# EAGLE board Module_T+H_01v (EAGLE 7.7.0)
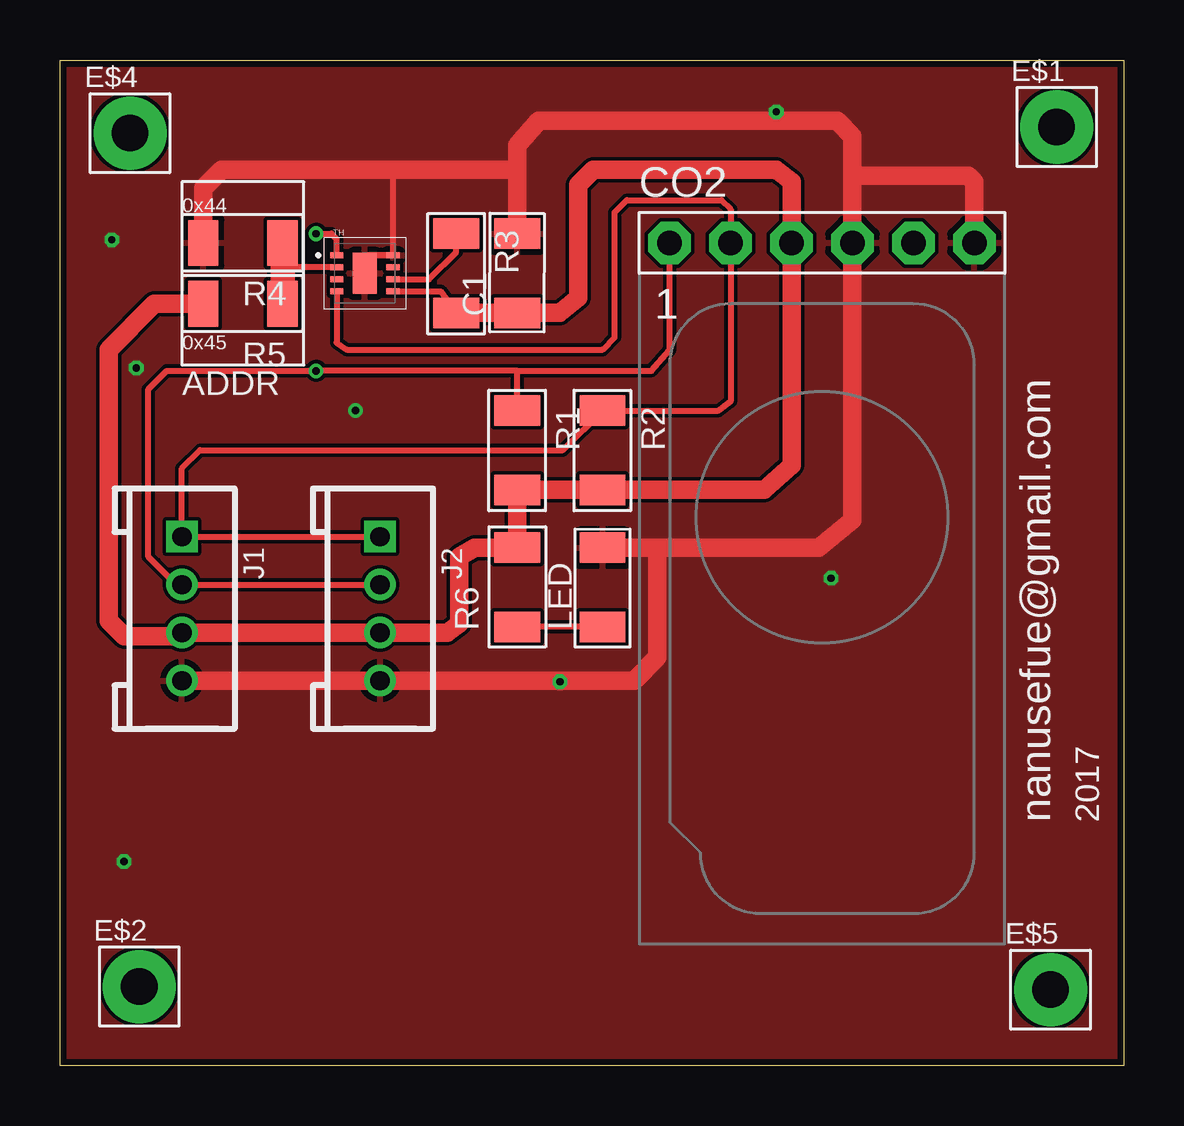
[diagram p0: board, top side]
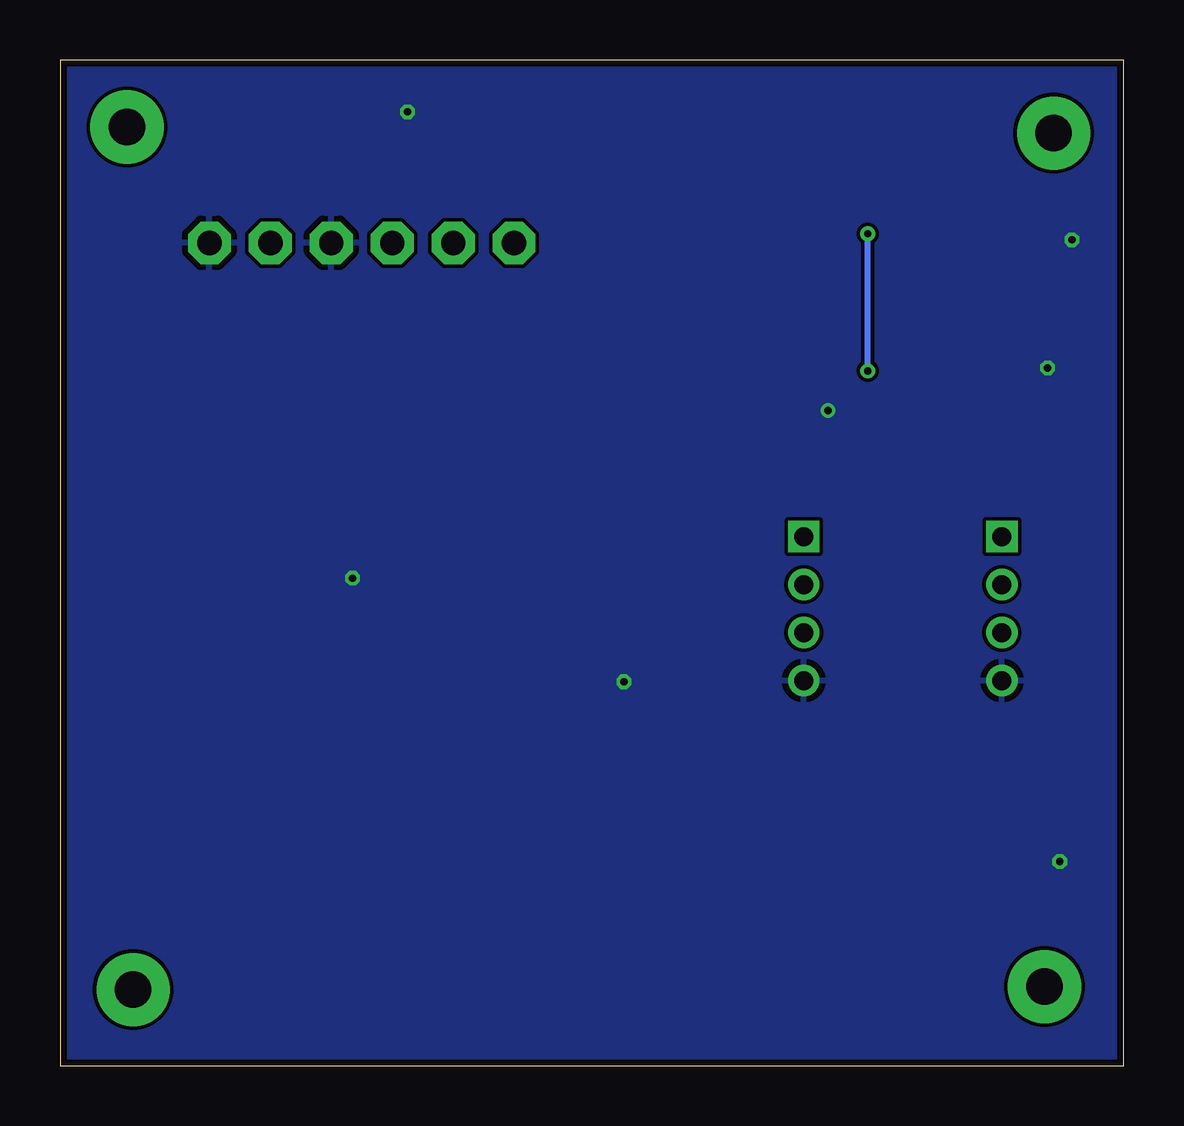
[diagram p1: board, bottom side, seen from below]

Size 44.32 x 41.91 mm. Coordinates in mm from the lower left corner, seen from the top.
Outline: 0,0 0,41.91 44.32,41.91 44.32,0 0,0
Copper layers (1*16): Top 0.035mm / dielectric 1.5mm / Bottom 0.035mm
Design rules "SeeedStudio_2layer_DRU_no_angle_20140221": minimum track width 6mil, minimum drill 12mil, track to track 6mil, track to pad 6mil, pad to pad 6mil, via to via 6mil, smd to smd 0mil, copper to edge 10mil, drill to drill 10mil, minimum pad ring 10mil, minimum via ring 6mil, stop-mask expansion 2mil, vias tented up to drill 100mil, thermal gap 10mil

## Footprints (pad centres in the part's own frame; a part is rotated, then mirrored left to right if it is on the bottom)
C1206FAB = smd 1.27 x 1.905: 1 -1.651,0; 2 1.651,0
PINS = drill 1.016 pad 1.778 octagon: GND 1.27,0; NC/GND/10K 6.35,0; PWM/FC 3.81,0; RX/SCL -3.81,0; TX/SDA -6.35,0; VCC -1.27,0
1P-100/60MIL = drill 1.524 pad 3.048: 1 0,0
HW4-2.0 = drill 0.8 pad 1.27 square: 1 -3,0 | drill 0.8 pad 1.27: 2 -1,0; 3 1,0; 4 3,0
LED1206FAB = smd 1.27 x 1.905: 1 -1.651,0; 2 1.651,0
R1206FAB = smd 1.27 x 1.905: 1 -1.651,0; 2 1.651,0
SHT3X = smd 0.55 x 0.25: P$1 -1.175,0.75; P$2 -1.175,0.25; P$3 -1.175,-0.25; P$4 -1.175,-0.75; P$5 1.175,-0.75; P$6 1.175,-0.25; P$7 1.175,0.25; P$8 1.175,0.75 | smd 1 x 1.7: PAD 0,0

## Placement (x,y rotation side)
C1  [C1206FAB]  19.05,33.02 90 top
CO2  T6713-6H  [PINS]  31.75,34.29 0 top
E$1  [1P-100/60MIL]  41.53,39.12 0 top
E$2  GND  [1P-100/60MIL]  3.3,3.3 0 top
E$4  [1P-100/60MIL]  2.92,38.86 0 top
E$5  gnd  [1P-100/60MIL]  41.27,3.17 0 top
J1  4P-2.0  [HW4-2.0]  5.08,19.05 270 top
J2  4P-2.0  [HW4-2.0]  13.34,19.05 270 top
LED  LEDFAB1206  [LED1206FAB]  22.61,19.94 90 top
R1  10k  [R1206FAB]  19.05,25.65 270 top
R2  10k  [R1206FAB]  22.61,25.65 270 top
R3  10k  [R1206FAB]  16.51,33.02 270 top
R4  0  [R1206FAB]  7.62,34.29 180 top
R5  0  [R1206FAB]  7.62,31.75 180 top
R6  1,5k  [R1206FAB]  19.05,19.94 90 top
TH  SHT31-DIS  [SHT3X]  12.7,33.02 0 top

## Library data of the parts
C1 LED = fab_2
CO2 = T6713-6H
E$1 E$2 E$4 E$5 J1 J2 = Seeed-OPL-Connector
R1-R6 = fab
TH = thomasb9511

## Nets
ADDR: R4.1 R5.1 TH.P$2
GND: C1.2 CO2.GND CO2.NC/GND/10K J1.4 J2.4 LED.2 R4.2 TH.P$8 TH.PAD
N$1: LED.1 R6.1
RST: R3.1 TH.P$6
SCL: CO2.RX/SCL J1.1 J2.1 R2.1 TH.P$4
SDA: CO2.TX/SDA J1.2 J2.2 R1.1 TH.P$1
VCC: C1.1 CO2.VCC J1.3 J2.3 R1.2 R2.2 R3.2 R5.2 R6.2 TH.P$5

## Tracks (layer width: path | path; a pad name or v marks a point on that pad's centre or on a via)
ADDR
  Top 0.254: TH.P$2 9.52,33.27 9.27,33.02
  Top 1.016: R5.1 9.27,33.02 R4.1
GND  (via drill 0.3 pad 0.25, 0.3 pad 0.3)
  Top 0.254: 12.7,33.66 12.81,33.77 TH.P$8 13.88,37.31
  Top 0.305: 12.7,33.66 TH.PAD | 13.88,37.31 13.84,37.34
  Top 0.762: R4.2 5.97,36.58 6.73,37.34 13.84,37.34 19.05,37.34 | 19.05,37.34 19.05,38.35 19.94,39.37 32.38,39.37 33.02,38.73 33.02,37.08 | C1.2 19.05,37.34 | 33.02,37.08 CO2.GND 33.02,22.73 31.62,21.59 24.89,21.59 | CO2.NC/GND/10K 38.1,36.83 37.85,37.08 33.02,37.08 | J1.4 J2.4 23.92,16.05 24.89,17.02 24.89,21.59 | LED.2 24.89,21.59
  other vias: 2.67,8.51 2.16,34.42 12.32,27.3 29.84,39.75 32.13,20.32 20.83,16 3.17,29.08
  pour Top: 0,41.91 0,0 44.32,0 44.32,41.91
  pour Bottom: 0,41.91 44.32,41.91 44.32,0 0,0
N$1
  Top 0.254: LED.1 R6.1
RST
  Top 0.254: TH.P$6 15.37,32.77 16.51,33.91 R3.1
SCL
  Top 0.254: TH.P$4 11.53,30.13 11.94,29.84 22.61,29.84 23.11,30.35 23.11,35.56 23.62,36.07 27.56,36.07 27.94,35.69 CO2.RX/SCL 27.94,27.69 27.43,27.3 R2.1 20.95,25.65 5.84,25.65 5.08,24.89 J1.1 J2.1
SDA  (via drill 0.3 pad 0.41)
  Top 0.254: TH.P$1 11.53,34.45 11.3,34.67 v10.67,34.67 | 19.05,28.96 24.64,28.96 25.4,29.84 CO2.TX/SDA | R1.1 19.05,28.96 | J2.2 J1.2 4.84,20.05 3.68,21.21 3.68,28.19 4.45,28.96 v10.67,28.96 19.05,28.96
  Bottom 0.254: v10.67,28.96 v10.67,34.67
VCC
  Top 0.254: TH.P$5 15.86,32.27 R3.2 | 18.8,31.37 C1.1
  Top 0.762: 16.38,31.37 R3.2 18.8,31.37 | R5.2 3.94,31.75 2.03,29.84 2.03,18.54 2.67,17.91 4.94,17.91 J1.3 J2.3 16.14,18.05 16.64,18.41 16.64,21.21 17.27,21.59 R6.2 R1.2 R2.2 29.34,24 30.48,25.02 CO2.VCC 30.48,36.83 29.84,37.34 22.23,37.34 21.59,36.7 21.59,32 20.83,31.37 C1.1

## Text on the board
tPlace: 0x44 | 0x45 | ADDR | nanusefue@gmail.com | 2017